# Altium PCB Crpto01JTAG.PcbDoc
Units mil, origin at the board's own origin, x right, y up, seen from the top; angles counter-clockwise.
Board outline 920 x 250 mil, 2 copper layers (Top Layer, Bottom Layer); 3 components, 8 nets, 34 pads, 2 vias.
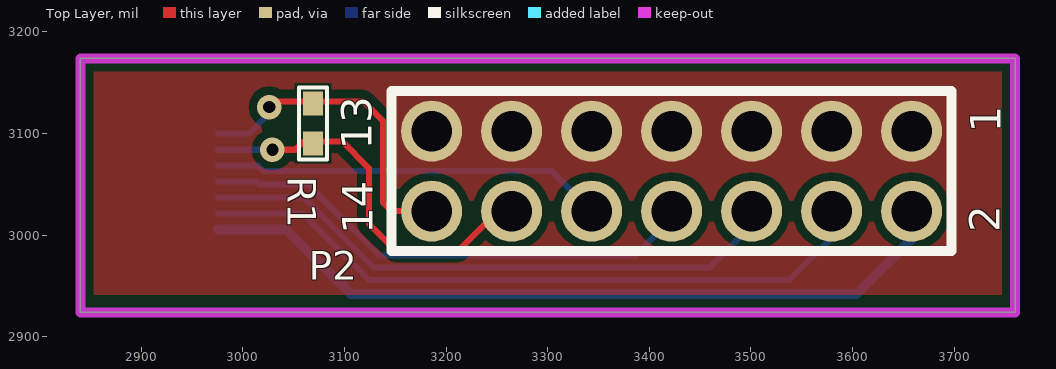
[diagram p0: Top Layer view]
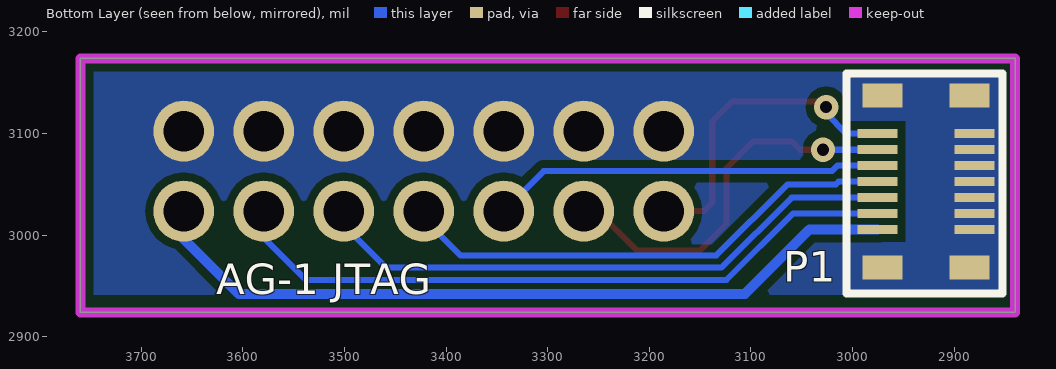
[diagram p1: Bottom Layer view, seen from below]

## Layer stack, top to bottom
Top Solder: solder mask 0.4, Solder Resist, Dk 3.5
Top Layer: signal copper 1.4
Dielectric 1: dielectric 12.6, FR-4, Dk 4.8
Bottom Layer: signal copper 1.4
Bottom Solder: solder mask 0.4, Solder Resist, Dk 3.5

## Board outline
2840,2924 3760,2924 3760,3174 2840,3174

## Design rules (kind name [scope] priority, off if disabled: settings)
Clearance [All] p1: gap=6 except(8: Arc-Poly Track-Poly SMDPad-Poly THPad-Poly Via-Poly Fill-Poly Poly-Poly Poly-Region Region-Region)
MinimumSolderMaskSliver [All] p1: minsoldermaskwidth=6
PolygonConnect [All] p1: connectstyle=Direct reliefconductorwidth=10 reliefentries=4 polygonreliefangle="90 Angle" airgapwidth=10
RoutingVias [All] p1: holewidth=12 width=24 viastyle="Through Hole" minholewidth=12 minwidth=24 maxholewidth=16 maxwidth=24
SilkToSilkClearance [All] p1: silktosilkclearance=6
SilkToSolderMaskClearance [IsPad] p1: minsilkscreentomaskgap=0 clearancetoexposedcopper=TRUE
SolderMaskExpansion [All] p1: expansion=4
Width [All] p1: maxlimit=10 minlimit=6 preferedwidth=6 minimp=50.000000 maximp=50.000000 favimp=50.000000
27 further rules are at their usual default settings.

## Components (designator, comment, footprint, x,y, rotation, side; value= is the part's Value field where it differs from the comment)
P1 "Header 7X2" JTAG_WM9059CT-ND 2880,3100 r270 bottom
P2 "Header 7X2" 2X7_2.0MM_HEADER 3422,3063 r180 top
R1 "Res Semi" 0402 3069,3110 r270 top

## Footprints (in the part's own frame and the unit in brackets; to place one, negate y for a bottom-side part, rotate by r counter-clockwise, add the part's x,y. Pads: shape width x height; smd on the part's side, far side on the other; paste and mask are expansions set on the pad)
2X7_2.0MM_HEADER [mil] "2x7_2.0mm_14Pin_JTAG_HEADER"
  round 60 hole 40: 1(-236.22,-39.37) 2(-236.22,39.37) 3(-157.48,-39.37) 4(-157.48,39.37) 5(-78.74,-39.37) 6(-78.74,39.37) 7(0,-39.37) 8(0,39.37) 9(78.74,-39.37) 10(78.74,39.37) 11(157.48,-39.37) 12(157.48,39.37) 13(236.22,-39.37) 14(236.22,39.37)
  silkscreen extent -276,-79 276,79
0402 [mm] "Chip Capacitor, Body 1.0x0.5mm, IPC High Density"
  rect 0.6x0.5 smd: 1(-0.5,0) 2(0.5,0)
  silkscreen extent -0.9,-0.35 0.9,0.35, body extent -0.55,-0.3 0.55,0.3, height 0.2
JTAG_WM9059CT-ND [mm]
  rect 0.6x1 smd: 0(-0.95,-2.298) 0(-0.95,-0.128) 0(3.35,-2.298) 0(3.35,-0.128)
  rect 0.22x1 smd: 1(0,0) 2(0,-2.425) 3(0.4,0) 4(0.4,-2.425) 5(0.8,0) 6(0.8,-2.425) 7(1.2,0) 8(1.2,-2.425) 9(1.6,0) 10(1.6,-2.425) 11(2,0) 12(2,-2.425) 13(2.4,0) 14(2.4,-2.425)
  silkscreen extent -1.5,-3.2 4,0.7, body extent -1.75,-2.5 4.15,0.1, height 0.96

## Part data
P1 P2: "Header, 7-Pin, Dual row"
R1: "Semiconductor Resistor"

## Via types
v1: diameter 24, hole 12, Top Layer to Bottom Layer, 2 vias

## Nets (pads, with @x,y where several pads share a name; then routed paths per layer and width w, separated by ;. In a path a pad name is that pad's centre, name@x,y a point inside that pad or via, vN(x,y) a via of type N, cw(c..) or ccw(c..) an arc to the next point about the centre after c; other vN are vias at no path point)
GND: P1.0 P1.1 P1.3 P1.5 P1.7 P1.9 P1.11 P1.13 P2.1 P2.3 P2.5 P2.7 P2.9 P2.11 P2.13
SPI_D1_MISO2: P1.2 P2.14 R1.1 | length 318.6
  Top Layer w6: v1(3026,3126) 3031.68,3131.68 3060,3131.68 3118.32,3131.68 3138,3112 3138,3032 3146.37,3023.63 P2.14
  Bottom Layer w6: P1.2 3006,3100 3026,3120 v1(3026,3126)
TCK: P1.10 P2.6 | length 585
  Bottom Layer w6: P1.10 3059.96,3037.01 3128.97,2968 3459,2968 3500.74,3009.74 P2.6
TDI: P1.6 P2.10 | length 386.4
  Bottom Layer w6: P1.6 3014.8,3068.5 3020.3,3063 3303.89,3063 P2.10
TDO: P1.8 P2.8 | length 499.2
  Bottom Layer w6: P1.8 3013.58,3052.76 3016.33,3050 3063.94,3050 3133.94,2980 3386,2980 3422,3016 P2.8
TMS: P1.12 P2.4 | length 674.4
  Bottom Layer w6: P1.12 3058.74,3021.26 3124,2956 3538,2956 3579.48,2997.48 P2.4
VCC3V3: P1.14 P2.2 | length 758.9
  Bottom Layer w10: P1.14 3042.49,3005.51 3106,2942 3604,2942 3658.22,2996.22 P2.2
WP#: P1.4 P2.12 R1.2 | length 385.6
  Top Layer w6: v1(3029,3084) 3051.69,3084 3060,3092.31 3097.69,3092.31 3124,3066 3124,3011 3150.37,2984.63 3212,2984.63 3251,3023.63 P2.12
  Bottom Layer w6: P1.4 2975.72,3084 v1(3029,3084)

## Polygon pours and split planes (outlines as drawn)
GND on Bottom Layer "Signal Layer 1-No Net" (solid, pour order 4): 2820,3180 3760,3180 3760,2920 2820,2920 2820,3180
GND on Top Layer "Signal Layer 1-No Net" (solid, pour order 6): 2820,3180 2820,2920 3760,2920 3760,3180 2820,3180

## Keep-outs
Keep-Out Layer:
  the board outline again, w10

## Silkscreen, mask and mechanical layers (free items; w line width, h text height)
Top Overlay:
  text "1" at 3746,3101 h30 r90
  text "13" at 3127,3084 h30 r90
  text "2" at 3745,3003 h30 r90
  text "14" at 3128,3001 h30 r90
Bottom Overlay:
  text "AG-1 JTAG" at 3626,2942 h30